# Altium PCB PCB_RAD.PcbDoc
Units mm, origin at the board's own origin, x right, y up, seen from the top; angles counter-clockwise.
Board outline 100.08 x 50.8 mm, 2 copper layers (Top Layer, Bottom Layer); 87 components, 56 nets, 297 pads, 29 vias.
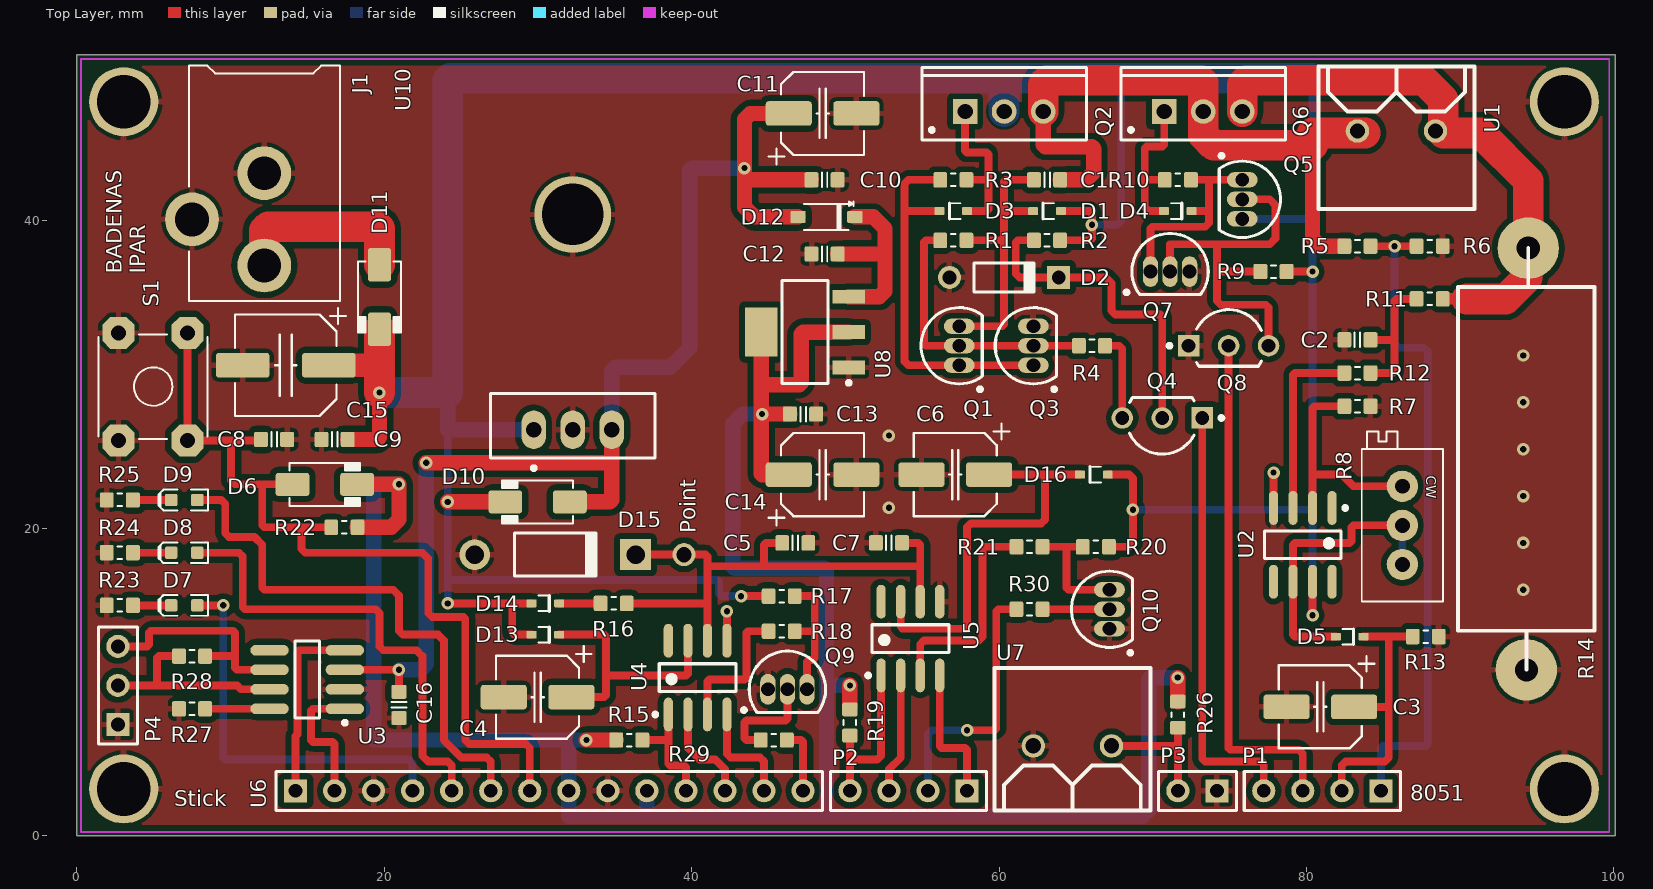
[diagram p0: Top Layer view]
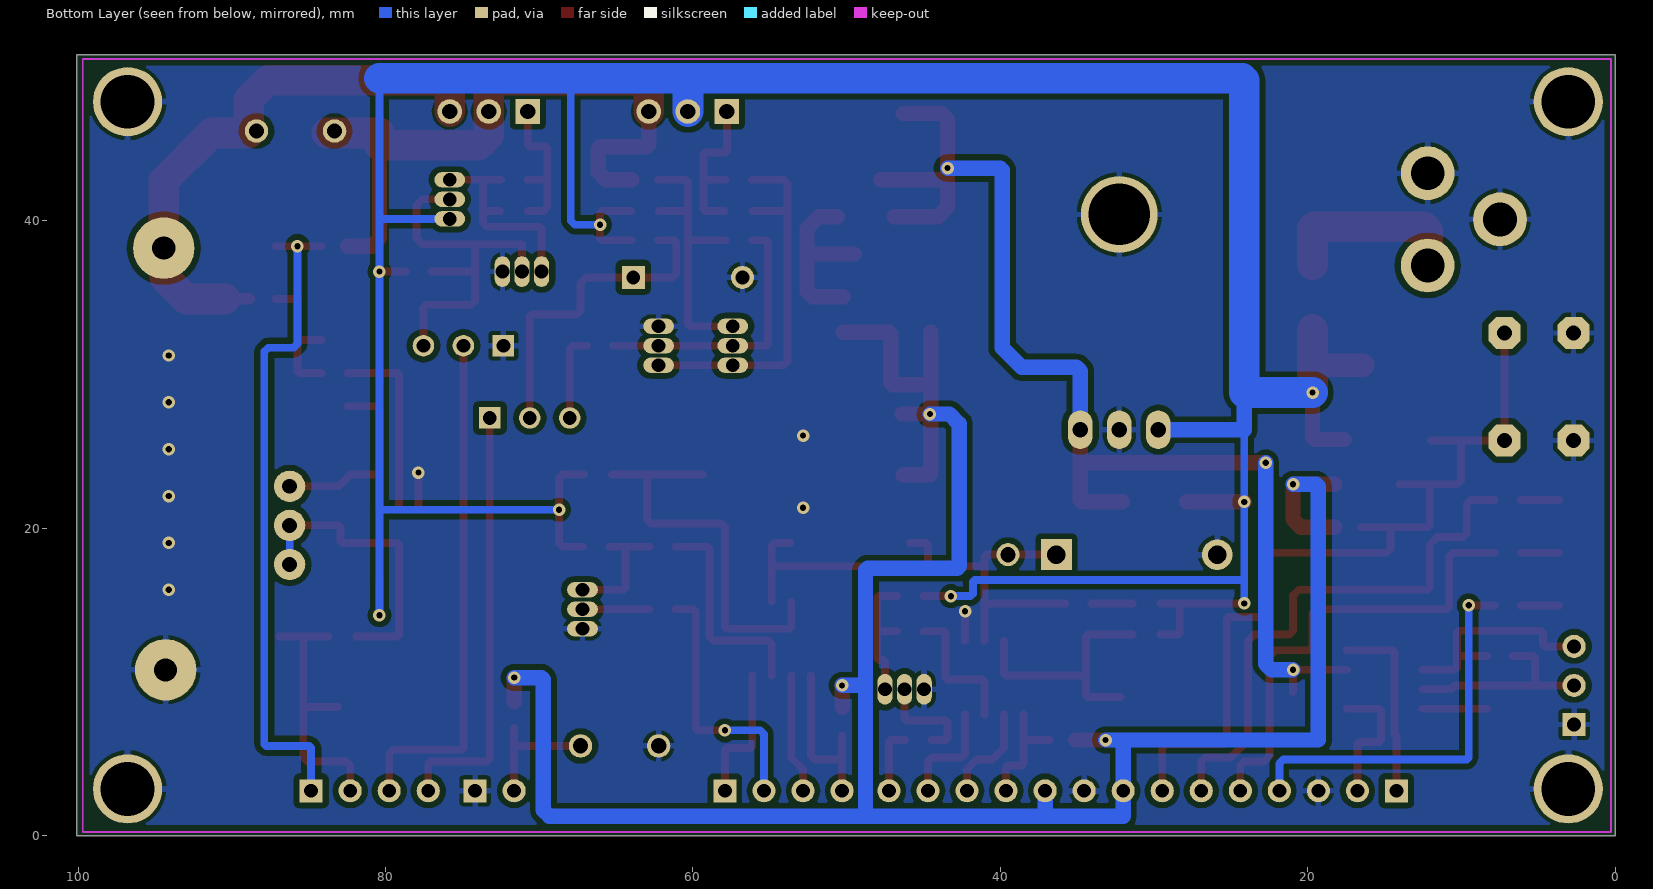
[diagram p1: Bottom Layer view, seen from below]
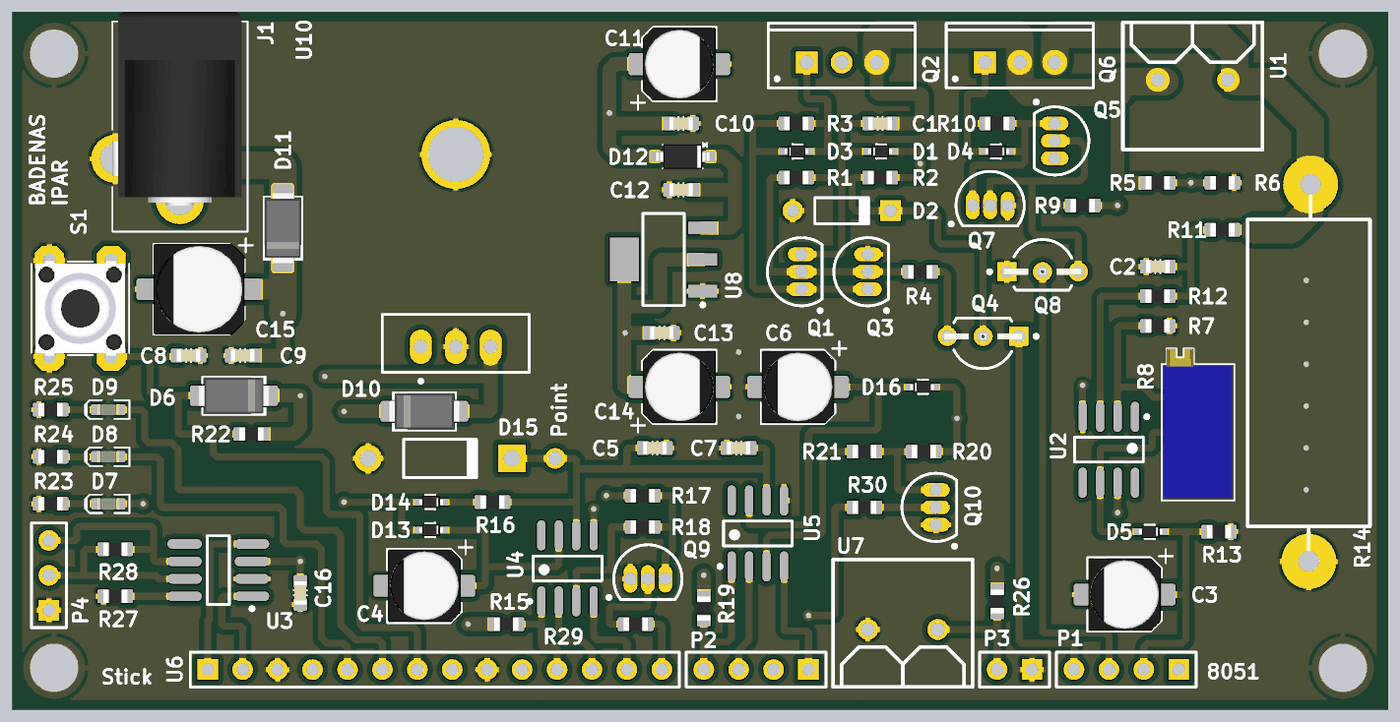
[diagram p2: 3D render of the assembled board from above, using the file's embedded part models]

## Layer stack, top to bottom
Top Solder: solder mask 0.0102, Solder Resist, Dk 3.5
Top Layer: signal copper 0.0356
Dielectric 1: dielectric 0.32, FR-4, Dk 4.8
Bottom Layer: signal copper 0.0356
Bottom Solder: solder mask 0.0102, Solder Resist, Dk 3.5

## Board outline
0,0 0,50.8 100.076,50.8 100.076,0

## Design rules (kind name [scope] priority, off if disabled: settings)
Clearance Clearance_GND [InNamedPolygon('GND')] p1: gap=0.381 ignorepadtopadclearanceinfootprint=FALSE except(0: Arc-Hole Track-Hole SMDPad-Hole THPad-Hole Via-Hole Fill-Hole Poly-Hole Region-Hole Text-Hole)
Clearance [All] p2: gap=0.203 ignorepadtopadclearanceinfootprint=FALSE except(0: Arc-Hole Track-Hole SMDPad-Hole THPad-Hole Via-Hole Fill-Hole Poly-Hole Region-Hole Text-Hole)
PlaneConnect [All] p1: planeconnectstyle=Relief reliefexpansion=0.762 reliefentries=4 reliefconductorwidth=0.381 reliefairgap=0.254
PolygonConnect PolygonConnect_VIA [IsVia] p1: connectstyle=Direct reliefconductorwidth=0.254 reliefentries=4 polygonreliefangle="90 Angle" airgapwidth=0.254
PolygonConnect [All] p2: connectstyle=Relief reliefconductorwidth=0.381 reliefentries=4 polygonreliefangle="90 Angle" airgapwidth=0.254
RoutingVias [All] p1: holewidth=0.406 width=0.813 viastyle="Through Hole" minholewidth=0.406 minwidth=0.813 maxholewidth=0.406 maxwidth=0.813
SolderMaskExpansion [All] p1: expansion=0.102
Width Width_12V [InNet('12V')] p1: maxlimit=50.8 minlimit=0.508 preferedwidth=0.508
Width Width_3V3 [InNet('3V3')] p2: maxlimit=50.8 minlimit=0.5 preferedwidth=0.508
Width Width_5V [InNet('5V')] p3: maxlimit=50.8 minlimit=0.5 preferedwidth=0.508
Width Width_1 [All] p4: maxlimit=50.8 minlimit=0.152 preferedwidth=0.203
29 further rules are at their usual default settings.

## Classes and differential pairs
component class "Controlador del Motor DC": C1 C2 C3 D1 D2 D3 D4 D5 Q1 Q2 Q3 Q4 Q5 Q6 Q7 Q8 R1 R2 R3 R4 R5 R6 R7 R8 R9 R10 R11 R12 R13 R14 U1 U2
component class "Fuente de Alimentación": 2 C9 C10 C11 C12 C13 C14 C15 D10 D11 D12 J1 U8 U10
component class "Microcontrolador 8051": P1 P2 P3 R26 U7
component class "Microcontrolador LPC1769": C8 D6 D7 D8 D9 R22 R23 R24 R25 S1 U6
component class "Protocolo CAN": C16 P4 R27 R28 U3
component class "Protocolo LIN": C4 C5 C6 C7 D13 D14 D15 D16 Q9 Q10 R15 R16 R17 R18 R19 R20 R21 R29 R30 U4 U5

## Components (designator, comment, footprint, x,y, rotation, side; value= is the part's Value field where it differs from the comment)
C1 "47n" CAPC1608X90N 63.119,42.672 r0 top
C2 "100n" CAPC1608X90N 83.312,32.258 r180 top
C3 "10u" CAP_Elec_5x5.7 80.899,8.382 r0 top
C4 "1u" CAP_Elec_5x5.7 29.972,9.017 r0 top
C5 "220pF" CAPC1608X90N 46.736,19.05 r0 top
C6 "1u" CAP_Elec_5x5.7 57.15,23.495 r0 top
C7 "220pF" CAPC1608X90N 52.832,19.05 r180 top
C8 "100n" CAPC1608X90N 12.827,25.781 r0 top
C9 "100n" CAPC1608X90N 16.764,25.781 r180 top
C10 "100n" CAPC1608X90N 48.641,42.672 r0 top
C11 "10u x 16V" CAP_Elec_5x5.7 48.514,46.99 r180 top
C12 "100n" CAPC1608X90N 48.641,37.846 r180 top
C13 "100n" CAPC1608X90N 47.244,27.432 r0 top
C14 "10u x 16V" CAP_Elec_5x5.7 48.514,23.495 r180 top
C15 "100u x 16V" CAP_ELEC_6.3X4.2 13.589,30.607 r0 top
C16 "100nF" CAPC1608X90N 20.955,8.509 r270 top
D1 "1N4148" SOD523F 63.119,40.64 r0 top
D2 "1N750" DO-35 60.325,36.322 r0 top
D3 "1N4148" SOD523F 57.023,40.64 r0 top
D4 "1N4148" SOD523F 71.628,40.64 r180 top
D5 "1N4148" SOD523F 82.804,12.954 r180 top
D6 "1N4007" DO-214AC 16.129,22.86 r0 top
D7 "Green" LED-0603-GREEN 6.985,14.986 r180 top
D8 "Green" LED-0603-GREEN 6.985,18.415 r180 top
D9 "Green" LED-0603-GREEN 6.985,21.844 r180 top
D10 "1N4007" DO-214AC 29.972,21.717 r180 top
D11 "1N4007" DO-214AC 19.685,35.052 r270 top
D12 "1N5819" SOD123 48.768,40.259 r180 top
D13 "1N4148" SOD523F 30.48,13.081 r180 top
D14 "1N4148" SOD523F 30.48,15.113 r180 top
D15 "P6KE43CA" DO-41 31.115,18.288 r0 top
D16 "1N4148" SOD523F 66.167,23.495 r0 top
J1 "CONN_PWR_JACK_2.1x5.5mm" CONN_PWR_JACK_2.1X5.5MM 12.192,50.8 r0 top
P1 "Header 4" HDR1X4 84.836,2.921 r180 top
P2 "Header 4" HDR1X4 57.912,2.921 r180 top
P3 "Header 2" HDR1X2 74.168,2.921 r180 top
P4 "Header 3" HDR1X3 2.667,7.239 r90 top
Q1 "BC547B" TO-92A 57.404,31.877 r0 top
Q2 "IRFZ44N" TO-220AB 60.325,47.117 r0 top
Q3 "BC557B" TO-92A 62.23,31.877 r0 top
Q4 "2N7002" ONSC-TO-92-3-29-11_AM_BL 70.612,27.178 r180 top
Q5 "BC547B" TO-92A 75.819,41.402 r180 top
Q6 "IRFZ44N" TO-220AB 73.279,47.117 r0 top
Q7 "BC557B" TO-92A 71.12,36.703 r270 top
Q8 "2N7002" ONSC-TO-92-3-29-11_AM_BL 74.93,31.877 r0 top
Q9 "BC547B" TO-92A 46.228,9.525 r270 top
Q10 "BC547B" TO-92A 67.183,14.732 r0 top
R1 "10K" RESC1608N_ZERO 57.023,38.735 r180 top
R2 "1K" RESC1608N_ZERO 63.119,38.735 r180 top
R3 "10R" RESC1608N_ZERO 57.023,42.672 r0 top
R4 "1K" RESC1608N_ZERO 66.04,31.877 r0 top
R5 "33K" RESC1608N_ZERO 83.312,38.354 r180 top
R6 "10K" RESC1608N_ZERO 88.011,38.354 r0 top
R7 "4.7K" RESC1608N_ZERO 83.312,27.94 r180 top
R8 "Multivuelta 10K" TRIMPOT_THT_PV36X 86.233,20.193 r270 top
R9 "10K" RESC1608N_ZERO 77.851,36.703 r180 top
R10 "10R" RESC1608N_ZERO 71.628,42.672 r180 top
R11 "1K" RESC1608N_ZERO 88.011,34.925 r180 top
R12 "10K" RESC1608N_ZERO 83.312,30.099 r180 top
R13 "10K" RESC1608N_ZERO 87.757,12.954 r180 top
R14 "Shunt 5W 2.4R" Resistor 94.361,24.511 r270 top
R15 "4K7" RESC1608N_ZERO 35.941,6.223 r0 top
R16 "1K" RESC1608N_ZERO 34.925,15.113 r0 top
R17 "3K9" RESC1608N_ZERO 45.855,15.586 r0 top
R18 "33K" RESC1608N_ZERO 45.855,13.3 r180 top
R19 "4K7" RESC1608N_ZERO 50.292,7.366 r270 top
R20 "3K9" RESC1608N_ZERO 66.294,18.796 r180 top
R21 "33K" RESC1608N_ZERO 61.976,18.796 r180 top
R22 "10K" RESC1608N_ZERO 17.399,20.066 r180 top
R23 "220" RESC1608N_ZERO 2.794,14.986 r180 top
R24 "220" RESC1608N_ZERO 2.794,18.415 r180 top
R25 "220" RESC1608N_ZERO 2.794,21.844 r180 top
R26 "10K" RESC1608N_ZERO 71.628,7.874 r270 top
R27 "2K2" RESC1608N_ZERO 7.493,8.255 r0 top
R28 "120R" RESC1608N_ZERO 7.493,11.684 r0 top
R29 "4K7" RESC1608N_ZERO 45.339,6.223 r180 top
R30 "4K7" RESC1608N_ZERO 61.976,14.732 r0 top
S1 "SW_THT_PB_4.3mm" TACT-SWITCH-TS1143 4.953,29.21 r270 top
U1 "Bornera_2P" Bornera 85.852,45.847 r0 top
U2 "TL061IDRE4" TI-D8_N 79.756,18.923 r270 top
U3 "MCP2551T-E/SN" SOIC-SN8_M 14.986,10.16 r180 top
U4 "MCP2003A-E/SN" SOIC-SN8_N 40.386,10.287 r90 top
U5 "MCP2003A-E/SN" SOIC-SN8_N 54.229,12.827 r90 top
U6 "LPC1769" Header_12 30.734,2.921 r0 top
U7 "Bornera_2P" Bornera 64.77,5.842 r180 top
U8 "AP7361" MP04A_L 47.371,32.766 r180 top
U10 "LM7805" "TO-220 FLAT" 32.258,26.416 r180 top

## Footprints (in the part's own frame and the unit in brackets; to place one, negate y for a bottom-side part, rotate by r counter-clockwise, add the part's x,y. Pads: shape width x height; smd on the part's side, far side on the other; paste and mask are expansions set on the pad)
Bornera [mil] "Bornera Pitch 5_mm"
  round 60 hole 39.37: 1(100,0) 2(-100,0)
  silkscreen extent -200,-200 200,165
CAP_Elec_5x5.7 [mm] "Capacitor, polarized, aluminum can; 5x5.7mm DxH"
  round 0.508 on Mech15: 0(0,0)
  rrect25% 3x1.6 smd: 1(2.2,0) 2(-2.2,0)
  silkscreen extent -2.7,-2.7 3.5,3.3, body extent -2.65,-2.65 2.65,2.65, height 5.7
CAP_ELEC_6.3X4.2 [mm] "Capacitor, polarized, aluminum can; 6.3x4.2mm DxH"
  round 0.508 on Mech15: 0(0,0)
  rrect25% 3.5x1.6 smd: 1(2.8,0) 2(-2.8,0)
  silkscreen extent -3.3,-3.3 3.9,3.7, body extent -3.3,-3.3 3.3,3.3, height 4.23
CAPC1608X90N [mm] "Chip Capacitor, Body 1.6x0.8mm, EIA 0603, IPC Medium Density"
  round 0.254 on Mech15: 0(0,0)
  rrect25% 0.9x1 smd: 1(-0.85,0) 2(0.85,0)
  Top Layer pour cut-out: -0.6,0.5 -0.4,0.7 0.4,0.7 0.6,0.5 0.6,-0.5 0.4,-0.7 -0.4,-0.7 -0.6,-0.5
  silkscreen extent -0.18,-0.48 0.18,0.48, body extent -0.85,-0.45 0.85,0.45, height 0.89
CONN_PWR_JACK_2.1X5.5MM [mm] "Power Connector, 2.1mm ID, 5.5mm OD"
  round 3.5 hole 2.2: 1(0,-13.7) 2(0,-7.7) 3(-4.7,-10.7)
  silkscreen extent -4.9,-16 4.92,-0.7, body extent -4.9,-14.1 4.5,0, height 11
DO-35 [mm] "Diode, Axial; Body 3.8 x 1.9 mm (LxDia. max), Lead Dia. 0.53 mm (max)"
  round 1.5 hole 0.9: 1(-3.55,0)
  rect 1.5x1.5 hole 0.9: 2(3.55,0)
  silkscreen extent -1.95,-0.95 2.05,0.95
DO-41 [mm] "Diode, Axial; Body 5.2 x 2.7 mm (LxDia. max), Lead Dia. 0.86 mm (max)"
  round 2 hole 1.2: 1(-5.23,0)
  rect 2x2 hole 1.2: 2(5.23,0)
  silkscreen extent -2.65,-1.4 2.75,1.4
DO-214AC [mm] "JEDEC DO214 variation AC. SMA"
  round 0.508 on Mech15: 0(0,0)
  rrect25% 2.2x1.5 smd: A(-2.1,0) K(2.1,0)
  silkscreen extent -2.3,-1.4 2.3,1.4, body extent -2.6,-1.3 2.6,1.3, height 2.42
HDR1X2 [mm] "Connector; Header; 2 Position"
  rect 1.5x1.5 hole 0.9: 1(0,0)
  round 1.5 hole 0.9: 2(2.54,0)
  silkscreen extent -1.27,-1.27 3.81,1.27
HDR1X3 [mm] "Connector; Header; 3 Position"
  rect 1.5x1.5 hole 0.9: 1(0,0)
  round 1.5 hole 0.9: 2(2.54,0) 3(5.08,0)
  silkscreen extent -1.27,-1.27 6.35,1.27
HDR1X4 [mm] "Connector; Header; 4 Position"
  rect 1.5x1.5 hole 0.9: 1(0,0)
  round 1.5 hole 0.9: 2(2.54,0) 3(5.08,0) 4(7.62,0)
  silkscreen extent -1.27,-1.27 8.89,1.27
Header_12 [mm] "Header 12 Pin"
  rect 1.5x1.5 hole 0.9: 1(-16.51,0)
  round 1.5 hole 0.9: 2(-13.97,0) 3(-11.43,0) 4(-8.89,0) 5(-6.35,0) 6(-3.81,0) 7(-1.27,0) 8(1.27,0) 9(3.81,0) 10(6.35,0) 11(8.89,0) 12(11.43,0) 13(13.97,0) 14(16.51,0)
  silkscreen extent -17.78,-1.27 17.78,1.27
LED-0603-GREEN [mm]
  round 0.254 on Mech15: 0(0,0)
  rrect25% 0.8x0.8 smd: A(-0.85,0) K(0.85,0)
  Top Layer pour cut-out: -0.5,0.5 0.5,0.5 0.5,-0.5 -0.5,-0.5
  silkscreen extent -1.55,-0.67 1.68,0.67, body extent -0.8,-0.4 0.8,0.4, height 0.75
MP04A_L [mm] "SOT223, 4-Leads, Body 6.5x3.5mm, Pitch 2.3mm, Lead Span 7mm, IPC High Density"
  rect 2.1x0.9 smd: 1(-2.85,2.3) 2(-2.85,0) 3(-2.85,-2.3)
  rect 2.1x3.2 smd: 4(2.85,0)
  silkscreen extent -2.98,-3.35 1.5,3.42, body extent -1.86,-3.35 1.86,3.35, height 1.8
ONSC-TO-92-3-29-11_AM_BL [mm] "TO, 3-Leads, Body Dia 4.7mm, Pitch 2.6mm"
  rect 1.4x1.4 hole 0.9: 1(-2.6,0)
  round 1.4 hole 0.9: 2(0,0) 3(2.6,0)
  silkscreen extent -3.98,-1.34 2.13,2.35, body extent -2.84,-1.34 2.84,2.35, height 5.33
RESC1608N_ZERO [mm] "Chip Resistor, Body 1.6x0.8mm, 0603, IPC Medium Density"
  round 0.254 on Mech15: 0(0,0)
  rrect25% 0.9x1 smd: 1(-0.85,0) 2(0.85,0)
  Top Layer pour cut-out: -0.6,0.5 -0.4,0.7 0.4,0.7 0.6,0.5 0.6,-0.5 0.4,-0.7 -0.4,-0.7 -0.6,-0.5
  silkscreen extent -0.15,-0.41 0.15,0.41, body extent -0.87,-0.47 0.88,0.48, height 0.54
Resistor [mm] "High Power Resistor 10W"
  round 4 hole 1.5: 1(13.716,-0.063) 2(-13.716,0.063)
  silkscreen extent -13.72,-4.51 13.72,4.38
SOD123 [mm] "SOD-123; 2 Leads; Body 2.7 x 1.6 mm, (LxW)"
  round 0.508 on Mech15: 0(0,0)
  rrect25% 1x0.8 smd: A(1.85,0) K(-1.85,0)
  silkscreen extent -1.75,-1 1.45,0.85, body extent -1.95,-0.9 1.95,0.9, height 1.18
SOD523F [mm] "SOD-523F; 2 Leads; Body 1.3 x 0.9 mm, (LxW)"
  round 0.508 on Mech15: 0(0,0)
  rrect20% 0.65x0.5 smd: A(0.9,0) K(-0.9,0)
  Top Layer pour cut-out: -0.725,-0.25 -0.725,0.25 -0.525,0.45 0.525,0.45 0.725,0.25 0.725,-0.25 0.525,-0.45 -0.525,-0.45
  silkscreen extent -0.25,-0.51 0.45,0.51, body extent -0.85,-0.45 0.85,0.45, height 0.7
SOIC-SN8_M [mm] "SOIC, 8-Leads, Body 4.9x3.9mm, Pitch 1.27mm, IPC Low Density"
  oval 2.5x0.7 smd: 1(-2.45,1.905) 2(-2.45,0.635) 3(-2.45,-0.635) 4(-2.45,-1.905) 5(2.45,-1.905) 6(2.45,-0.635) 7(2.45,0.635) 8(2.45,1.905)
  silkscreen extent -2.58,-2.5 0.8,2.93, body extent -2,-2.5 2,2.5, height 1.75
SOIC-SN8_N [mm] "SOIC, 8-Leads, Body 4.9x3.9mm, Pitch 1.27mm, IPC Medium Density"
  oval 2.2x0.6 smd: 1(-2.4,1.905) 2(-2.4,0.635) 3(-2.4,-0.635) 4(-2.4,-1.905) 5(2.4,-1.905) 6(2.4,-0.635) 7(2.4,0.635) 8(2.4,1.905)
  silkscreen extent -2.52,-2.5 0.9,2.88, body extent -2,-2.5 2,2.5, height 1.75
TACT-SWITCH-TS1143 [mm] "Bondtact sealed TH tact switch"
  round 0.508 on Mech15: 0(0,0)
  oct 2.1x2.1 hole 0.965: 1(-3.5,-2.25) 1(3.5,-2.25) 2(-3.5,2.25) 2(3.5,2.25)
  silkscreen extent -3.4,-3.56 3.4,3.56, body extent -4.13,-3.25 4.13,3.25, height 4.3
TI-D8_N [mm] "SOIC, 8-Leads, Body 4.9x3.9mm, Pitch 1.27mm, IPC Medium Density"
  oval 2.2x0.6 smd: 1(-2.4,1.905) 2(-2.4,0.635) 3(-2.4,-0.635) 4(-2.4,-1.905) 5(2.4,-1.905) 6(2.4,-0.635) 7(2.4,0.635) 8(2.4,1.905)
  silkscreen extent -2.52,-2.5 0.9,2.88, body extent -2,-2.5 2,2.5, height 1.75
TO-92A [mm] "TO, Flat Index; 3 In-Line, Axial Leads; Body Dia. 4.5mm; Leads 0.51 x 0.48 mm (max)"
  oval 2x1 hole 0.9: 1(0,-1.27) 2(0,0) 3(0,1.27)
  silkscreen extent -2.48,-2.95 1.5,2.48, body extent -2.48,-2.5 1.5,2.5, height 6.86
"TO-220 FLAT" [mm]
  oval 1.6x2.5 hole 1: 1(2.54,0) 2(0,0) 3(-2.54,0)
  round 5 hole 4: ""(0,-14)
  silkscreen extent -5.35,-2.35 5.35,2.62, body extent -5.4,-2.35 5.4,1.9, height 19.4
TO-220AB [mm] "TO, Thru-Hole, Vertical, Heatsink Mounted; 3 In-Line Leads; Pitch 2.54 mm"
  rect 1.6x1.6 hole 1: 1(-2.54,0)
  round 1.6 hole 1: 2(0,0) 3(2.54,0)
  silkscreen extent -5.35,-1.85 5.35,2.85, body extent -5.4,-1.9 5.4,2.9, height 19.3
TRIMPOT_THT_PV36X [mil] "TRIMMER, MURATA, PV36X"
  round 80 hole 38: CCW(100,0) CW(-100,0) W(0,0)
  silkscreen extent -240,-104 195,104, body extent -240,-98 189,98, height 394

## Part data
C1: library part CAPC_47n_0603_X7R_50V_10%, "Capacitor SMD Cer 47nF 10% 50V X7R 0603"
C2 C8 C9 C10 C12 C13 C16: library part CAPC_47n_0603_X7R_50V_10%, "Capacitor SMD Cer 100nF 10% 50V X7R 0603"
C3 C4 C6 C11 C14: library part CAP_Elec_4x4
C5 C7: library part CAPC_47n_0603_X7R_50V_10%, "Capacitor SMD Cer 220pF 10% 50V X7R 0603"
C15: library part CAP_Elec_6.2x6.2
D1 D3 D4 D5 D13 D14 D16: library part DIODE_1N4148_200mA_SOD523F, "Diode 1N4148 SMD SOD-523F"
D2: library part "Diode 1N914", "Diodo 1N750 THD DO-35"
D6 D10 D11: library part DIODE_100V_1.5A_SMA, "Diode 1N4007 SMD DO-214AC 100V 1.5A SMA"
D7 D8 D9: library part LED_SMD_Green_0603_570nm, "LED 0603 SMD Green 570nm 50mcd 20mA"
D12: library part DIODE_SCHOTTKY_40V_1A, "Diode Schottky SMD 40V 1A SOD123"
D15: library part "Diode 1N4007", "1 Amp General Purpose Rectifier Do-41"
J1: "Power Connector, THT, 2.1mm ID, 5.5mm OD"
P1 P2: "Header, 4-Pin"
P3: "Header, 2-Pin"
P4: "Header, 3-Pin"
Q1 Q5 Q9 Q10: library part 2N3904, "NPN General Purpose Amplifier"
Q2 Q6: library part NMOS-2, "N-Channel Power MOSFET"
Q3 Q7: library part 2N3906, "PNP General Purpose Amplifier"
Q4 Q8: library part CMP-1058-00948-1, "Small Signal MOSFET, 200 mA, 60 V, N-Channel, 3-Pin TO-92, Pb-Free, Fan-Fold"
R1 R6 R9 R12 R13 R22 R26: library part RES_0R_0603, "Resistor SMD 0603 10K 5%"
R2 R4 R11 R16: library part RES_0R_0603, "Resistor SMD 0603 1K 5%"
R3 R10: library part RES_0R_0603, "Resistor SMD 0603 10 Ohm 5%"
R5 R18 R21: library part RES_0R_0603, "Resistor SMD 0603 33K 5%"
R7 R15 R19 R29 R30: library part RES_0R_0603, "Resistor SMD 0603 4.7K 5%"
R8: library part RES_TRIMMER_10K_25T_THT, "Trimmer THD 10K 500mW 25-turn"
R14: library part "Resistor 10W", "Resistencia de Alambre 5W 2.4 Ohm"
R17 R20: library part RES_0R_0603, "Resistor SMD 0603 3.9K 5%"
R23 R24 R25: library part RES_0R_0603, "Resistor SMD 0603 220 Ohm 5%"
R27: library part RES_0R_0603, "Resistor SMD 0603 2.2K 5%"
R28: library part RES_0R_0603, "Resistor SMD 0603 120 Ohm 5%"
S1: "Switch, tact, 4.3mm stem"
U2: library part CMP-0017-00647-1, "Low-Power JFET-Input General-Purpose Operational Amplifier, 7 to 36 V, -40 to 85 degC, 8-pin SOIC (D8), Green (RoHS & no Sb/Br)"
U3: library part CMP-0186-00036-2, "High-Speed CAN Transceiver, 8-Pin SOIC, Extended Temperature, Tape and Reel"
U4 U5: library part CMP-0186-00221-1, "LIN J2602 Transceiver, 8-Pin SOIC, Extended Temperature"
U6: library part LPC1769_Pinera, "LPC1769 Pinera 5mm"
U8: library part CMP-0062-01652-3, "800mA Low-Dropout Linear Regulator, 4-pin SOT-223"
U10: "Regulador LM7805 Flat TO-220"

## Free pads (board coordinates)
  round 1.5 hole 1: 2(39.497,18.288)
  round 4.5 hole 3.5: ""(3.048,3.048) ""(3.048,47.752) ""(96.774,3.048) ""(96.774,47.752)

## Via types
v1: diameter 0.813, hole 0.406, Top Layer to Bottom Layer, tented both sides, 29 vias

## Nets (pads, with @x,y where several pads share a name; then routed paths per layer and width w, separated by ;. In a path a pad name is that pad's centre, name@x,y a point inside that pad or via, vN(x,y) a via of type N, cw(c..) or ccw(c..) an arc to the next point about the centre after c; other vN are vias at no path point)
3V3: C13.1 C14.1 D6.K R15.1 R19.1 R22.1 R26.1 U6.8 U6.10 U8.2 U8.4 | length 156.8
  Top Layer w1: D6.K v1(20.955,22.86) 20.955,20.574 20.447,20.066 R22.1 ; v1(33.147,6.223) R15.1 ; U8.4 44.521,29.337 ; C14.1 44.577,23.495 44.521,23.551 v1@44.521,27.432 ; C13.1 v1(44.577,27.432) v1@44.521,27.432 ; U8.2 47.244,32.766 47.117,32.639 47.117,29.464 46.99,29.337 44.521,29.337 ; R19.1@50.292,8.343 v1(50.292,9.779) ; R26.1 v1(71.628,10.287) ; v1@44.521,27.432 44.521,29.337
  Bottom Layer w1: 19.304,6.223 19.304,22.733 19.431,22.86 v1(20.955,22.86) ; 19.431,6.223 32.004,6.223 ; v1(33.147,6.223) 32.004,6.223 ; U6.10 37.084,1.27 ; v1(44.577,27.432) 43.307,27.432 42.672,26.797 42.672,17.526 42.799,17.399 48.641,17.399 48.768,17.272 48.768,9.779 ; v1(50.292,9.779) 48.768,9.779 ; v1(71.628,10.287) 69.85,10.287 69.723,10.16 69.723,1.651 69.342,1.27 48.768,1.27 ; 32.004,6.223 U6.8 32.004,1.27 37.084,1.27 ; 37.084,1.27 48.768,1.27 ; 48.768,1.27 48.768,9.779
5V: C10.1 C11.1 C16.1 D10.A D12.A U3.3 U10.3 | length 80.9
  Top Layer w0.508: U3.3 v1(20.955,10.795) C16.1
  Top Layer w1: v1(22.733,24.257) 34.798,24.257 ; D10.A 34.671,21.717 34.798,21.844 U10.3 ; C11.1 43.815,46.99 43.434,46.609 v1(43.434,43.434) 43.434,42.672 ; D12.A 44.069,40.259 43.434,40.894 43.434,42.672 ; C10.1 43.434,42.672
  Bottom Layer w1: v1(20.955,10.795) 22.352,10.795 22.733,11.176 v1(22.733,24.257) ; U10.3 34.798,30.226 35.052,30.48 38.608,30.48 39.878,31.75 39.878,43.307 40.005,43.434 v1(43.434,43.434)
12V: C9.1 C15.1 D1.A D10.K D11.K D13.A D14.A D16.A Q2.2 Q5.3 R2.1 R9.1 R17.1 R20.1 U2.7 U10.1 | length 228
  Top Layer w0.508: v1(24.13,15.113) 28.321,15.113 ; D13.A 28.448,13.081 28.321,13.208 28.321,15.113 ; D14.A 28.321,15.113 ; v1(43.215,15.586) R17.1 ; R2.1 65.913,38.735 66.04,38.862 v1(66.04,39.751) 66.04,40.513 65.913,40.64 D1.A ; D16.A 68.453,23.495 68.707,23.241 v1(68.707,21.209) 68.707,19.05 68.453,18.796 R20.1 ; R9.1 v1(80.391,36.703) ; v1(80.391,14.351) U2.7
  Top Layer w1: C9.1 19.558,25.781 19.685,25.908 v1(19.685,28.829) ; v1(24.13,21.717) D10.K
  Top Layer w1.5: C15.1 19.558,30.607
  Top Layer w2: v1(19.685,28.829) D11.K
  Bottom Layer w0.508: v1(24.13,15.113) 24.13,16.637 ; 24.13,26.416 v1(24.13,21.717) 24.003,21.59 24.13,21.463 24.13,16.637 ; v1(43.215,15.586) 41.945,15.586 41.783,15.748 41.783,16.51 41.656,16.637 24.13,16.637 ; v1(66.04,39.751) 67.691,39.751 67.945,40.005 67.945,48.387 ; v1(68.707,21.209) 80.391,21.209 ; Q5.3 80.391,40.132 ; v1(80.391,14.351) 80.391,21.209 ; 80.391,49.276 v1(80.391,36.703) 80.391,21.209
  Bottom Layer w1: 24.13,28.829 24.13,26.416 U10.1
  Bottom Layer w2: v1(19.685,28.829) 24.13,28.829 24.13,49.149 24.257,49.276 60.325,49.276 ; Q2.2 60.325,49.276 ; 80.391,49.276 60.325,49.276
ADC_SENSOR: P3.2 R26.2 U7.2 | length 8.4
  Top Layer w0.508: U7.2 71.628,5.842 ; P3.2 71.628,5.842 ; R26.2 71.628,5.842
GND: C2.2 C3.2 C4.2 C5.2 C6.2 C7.2 C8.2 C9.2 C10.2 C11.2 C12.2 C13.2 C14.2 C15.2 C16.2 D2.1 D15.1 J1.2 J1.3 P3.1 P4.1 pad. Q3.3 Q7.3 Q8.1 Q9.1 Q10.1 R6.2 R7.1 R13.1 R14.1 R23.2 R24.2 R25.2 R27.1 S1.1 U2.4 U3.2 U4.5 U5.5 U6.3 U6.9 U7.1 U8.1 U10. U10.2 | length 4.2
  Top Layer w0.508: U4.5 v1(42.291,14.605) ; U2.4 v1(77.851,23.622)
  other v1: 94.107,16.002 94.107,19.05 52.832,21.336 94.107,22.098 94.107,25.146 52.832,26.035 94.107,28.194 94.107,31.242
LED_1: D7.A U6.4 | length 25.9
  Top Layer w0.508: D7.A v1(9.525,14.986)
  Bottom Layer w0.508: v1(9.525,14.986) 9.525,5.08 9.652,4.953 21.59,4.953 21.844,4.699 U6.4
LED_2: D8.A U6.5 | length 30.9
  Top Layer w0.508: D8.A 10.541,18.415 10.795,18.161 10.795,14.859 10.922,14.732 19.431,14.732 19.685,14.478 19.685,12.319 19.939,12.065 22.098,12.065 22.479,11.684 22.479,5.207 22.86,4.826 24.13,4.826 24.384,4.572 U6.5
LED_3: D9.A U6.6 | length 35.9
  Top Layer w0.508: D9.A 9.398,21.844 9.652,21.59 9.652,19.685 9.906,19.431 11.557,19.431 12.065,18.923 12.065,16.129 12.192,16.002 20.574,16.002 20.955,15.621 20.955,13.335 21.209,13.081 23.495,13.081 23.876,12.7 23.876,6.223 25.019,5.08 26.67,5.08 26.924,4.826 U6.6
LPC_CAN_RX: U3.4 U6.1 | length 12.2
  Top Layer w0.508: U6.1 14.224,6.477 14.351,6.604 14.351,11.938 14.478,12.065 U3.4
LPC_CAN_TX: U3.1 U6.2 | length 8.8
  Top Layer w0.508: U6.2 16.764,5.969 16.637,6.096 15.367,6.096 15.24,6.223 15.24,8.128 15.367,8.255 U3.1
LPC_CS: U4.2 U6.12 | length 6.6
  Top Layer w0.508: U4.2 39.751,5.715 40.513,4.953 41.529,4.953 42.164,4.318 U6.12
LPC_RX: R15.2 U4.1 U6.11 | length 7.7
  Top Layer w0.508: R15.2 38.481,6.223 ; U4.1 38.481,6.223 ; U6.11 39.624,4.445 39.497,4.572 38.608,4.572 38.481,4.699 38.481,6.223
LPC_TX: U4.4 U6.13 | length 7.1
  Top Layer w0.508: U4.4 42.291,5.334 42.545,5.08 44.45,5.08 44.704,4.826 U6.13
LPC_W: R29.1 U6.14 | length 4.3
  Top Layer w0.508: R29.1 47.117,6.223 47.244,6.096 U6.14
MOTOR: C1.2 Q2.3 Q6.2 R5.2 U1.2 | length 45.2
  Top Layer w1: Q2.3 62.865,44.958 62.992,44.831 66.04,44.831 66.167,44.704 66.167,43.18 65.659,42.672 C1.2 ; 80.391,45.72 80.391,44.914 80.391,38.862 80.899,38.354 R5.2
  Top Layer w2: Q2.3 62.865,48.895 63.119,49.149 73.152,49.149 73.279,49.022 Q6.2 73.279,45.593 73.958,44.914 80.391,44.914 ; 80.391,45.72 U1.2@83.82,45.72
MS_BUS: C5.1 C7.1 D15.2 pad.2 R16.2 U4.6 U5.6 | length 36.9
  Top Layer w0.508: R16.2 41.021,15.113 ; D15.2 pad.2 40.894,18.288 41.021,18.161 41.021,15.113 ; U4.6 41.021,15.113 ; 41.021,17.526 44.704,17.526 ; C5.1 44.831,19.05 44.704,18.923 44.704,17.526 ; C7.1 54.737,19.05 54.864,18.923 54.864,17.526 ; U5.6 54.864,17.526 ; 44.704,17.526 54.864,17.526
NetC1_1: C1.1 D1.K Q1.3 R1.1 | length 18.6
  Top Layer w0.508: Q1.3 60.198,33.147 60.325,33.274 60.325,38.735 ; R1.1 60.325,38.735 ; D1.K 60.325,40.64 ; C1.1 60.452,42.672 60.325,42.545 60.325,40.64 ; 60.325,38.735 60.325,40.64
NetC2_1: C2.1 R11.2 R12.1 | length 9.2
  Top Layer w0.508: R12.1 85.598,30.099 85.725,30.226 85.725,32.258 ; C2.1 85.725,32.258 ; R11.2 85.852,34.925 85.725,34.798 85.725,32.258
NetC3_1: C3.1 D5.K P1.2 R13.2 | length 18.3
  Top Layer w0.508: P1.2 82.296,4.572 82.55,4.826 85.09,4.826 85.344,5.08 85.344,8.382 ; C3.1 85.344,8.382 ; D5.K 85.383,12.954 ; R13.2 85.344,12.954 85.344,8.382
NetC4_1: C4.1 D13.K U4.7 | length 16.7
  Top Layer w0.508: D13.K 34.29,13.081 34.417,12.954 34.417,10.414 ; C4.1 34.29,9.017 34.417,9.144 34.417,10.414 ; U4.7 39.751,10.541 39.624,10.414 34.417,10.414
NetC6_1: C6.1 D16.K U5.7 | length 26.7
  Top Layer w0.508: U5.7 53.594,13.589 53.721,13.462 57.785,13.462 57.912,13.589 57.912,20.066 58.166,20.32 62.738,20.32 62.992,20.574 62.992,23.495 ; C6.1 62.992,23.495 ; D16.K 62.992,23.495
NetC12_1: C12.1 D12.K U8.3 | length 11.9
  Top Layer w1: C12.1 52.578,37.846 ; U8.3 52.211,35.066 52.578,35.433 52.578,37.846 ; D12.K 51.816,40.259 52.578,39.497 52.578,37.846
NetD2_2: D2.2 Q4.2 R2.2 | length 21.6
  Top Layer w0.508: R2.2 61.214,38.735 61.087,38.608 61.087,36.576 61.341,36.322 D2.2 66.929,36.322 67.31,35.941 67.31,34.163 67.564,33.909 70.485,33.909 70.612,33.782 Q4.2
NetD3_A: D3.A Q2.1 R3.2 | length 10.6
  Top Layer w0.508: Q2.1 57.785,44.577 57.912,44.45 59.182,44.45 59.309,44.323 59.309,42.672 ; R3.2 59.309,42.672 ; D3.A 59.182,40.64 59.309,40.767 59.309,42.672
NetD3_K: D3.K Q1.1 Q3.1 R3.1 | length 24.7
  Top Layer w0.508: 53.848,40.64 D3.K ; R3.1 54.102,42.672 53.848,42.418 53.848,30.861 54.102,30.607 Q1.1 Q3.1
NetD4_A: D4.A Q6.1 R10.2 | length 10
  Top Layer w0.508: D4.A 69.723,40.64 69.469,40.894 69.469,42.672 ; Q6.1 70.739,44.958 70.612,44.831 69.596,44.831 69.469,44.704 69.469,42.672 ; R10.2 69.469,42.672
NetD4_K: D4.K Q5.1 Q7.1 R10.1 | length 14
  Top Layer w0.508: Q7.1 69.85,39.497 69.977,39.624 73.406,39.624 73.66,39.878 73.66,40.64 ; R10.1 Q5.1 ; D4.K 73.66,40.64 ; 73.66,42.672 73.66,40.64
NetD5_A: D5.A R8.CCW R8.W U2.6 | length 19.4
  Top Layer w0.508: D5.A 79.248,12.954 79.121,13.081 U2.6 79.121,18.923 79.248,19.05 82.804,19.05 82.931,19.177 82.931,20.066 83.058,20.193 R8.W
  Bottom Layer w0.508: R8.CCW R8.W
NetD7_K: D7.K R23.1 | length 2.5
  Top Layer w0.508: R23.1 D7.K
NetD8_K: D8.K R24.1 | length 2.5
  Top Layer w0.508: R24.1 D8.K
NetD9_K: D9.K R25.1 | length 2.5
  Top Layer w0.508: R25.1 D9.K
NetD11_A: D11.A J1.1 | length 12.3
  Top Layer w2: J1.1 12.192,39.37 12.446,39.624 19.558,39.624 19.685,39.497 D11.A
NetD14_K: D14.K R16.1 | length 2.7
  Top Layer w0.508: D14.K R16.1
NetP4_2: P4.2 R28.1 U3.7 | length 13.2
  Top Layer w0.508: P4.2 5.207,9.779 ; R28.1 5.334,11.684 5.207,11.557 5.207,9.779 ; U3.7 10.668,9.525 10.414,9.779 5.207,9.779
NetP4_3: P4.3 R28.2 U3.6 | length 15.1
  Top Layer w0.508: P4.3 4.572,12.319 4.699,12.446 4.699,13.208 4.826,13.335 10.16,13.335 10.287,13.208 10.287,11.684 ; R28.2 10.287,11.684 ; U3.6 10.414,10.795 10.287,10.922 10.287,11.684
NetQ1_2: Q1.2 Q3.2 R1.2 R4.1 | length 17.8
  Top Layer w0.508: R1.2 55.245,38.735 55.118,38.608 55.118,32.004 55.245,31.877 Q1.2 Q3.2 R4.1
NetQ4_3: Q4.3 R4.2 | length 5.7
  Top Layer w0.508: R4.2 67.818,31.877 68.012,31.683 Q4.3
NetQ5_2: Q5.2 Q7.2 Q8.3 R9.2 | length 25.8
  Top Layer w0.508: Q7.2 71.12,38.481 74.168,38.481 ; Q5.2 77.597,41.402 77.978,41.021 77.978,38.862 77.597,38.481 74.168,38.481 ; R9.2 74.168,36.703 ; Q8.3 77.53,34.357 77.343,34.544 74.422,34.544 74.168,34.798 74.168,36.703 ; 74.168,36.703 74.168,38.481
NetQ6_3: Q6.3 R11.1 R14.2 U1.1 | length 35.8
  Top Layer w0.762: R11.1 89.408,34.925
  Top Layer w2: Q6.3 75.819,48.895 76.073,49.149 87.63,49.149 88.9,47.879 88.9,45.72 91.313,45.72 94.424,42.608 94.424,39.116 94.361,39.052 94.361,36.322 92.964,34.925 90.424,34.925
NetQ9_2: Q9.2 R29.2 | length 6.9
  Top Layer w0.508: R29.2 43.561,6.223 43.434,6.35 43.434,7.366 43.561,7.493 46.101,7.493 46.228,7.62 Q9.2
NetQ9_3: Q9.3 R17.2 R18.1 | length 8.9
  Top Layer w0.508: R18.1 47.914,13.3 ; R17.2 47.914,15.586 48.006,15.494 48.006,11.557 47.879,11.43 47.625,11.43 47.498,11.303 Q9.3
NetQ10_2: Q10.2 R30.2 | length 4.4
  Top Layer w0.508: R30.2 Q10.2
NetQ10_3: Q10.3 R20.2 R21.1 | length 8.1
  Top Layer w0.508: R21.1 64.389,18.796 ; R20.2 64.389,18.796 ; Q10.3 64.516,16.002 64.389,16.129 64.389,18.796
NetR7_2: R7.2 R8.CW U2.2 | length 14.8
  Top Layer w0.508: U2.2 80.391,23.495 ; R7.2 80.518,27.94 80.391,27.813 80.391,23.495 ; R8.CW 83.058,22.733 82.296,23.495 80.391,23.495
NetR12_2: R12.2 U2.3 | length 12
  Top Layer w0.508: U2.3 79.121,29.972 79.248,30.099 R12.2
NetR18_2: R18.2 U4.3 | length 9.2
  Top Layer w0.508: U4.3 41.021,10.033 41.148,10.16 43.434,10.16 43.561,10.287 43.561,13.208 43.653,13.3 R18.2
NetR21_2: R21.2 U5.3 | length 14.3
  Top Layer w0.508: U5.3 54.864,12.446 55.118,12.7 58.674,12.7 58.928,12.954 58.928,18.669 59.055,18.796 R21.2
NetR27_2: R27.2 U3.8 | length 4.2
  Top Layer w0.508: R27.2 U3.8
PWM: P1.4 Q4.1 | length 28.1
  Top Layer w0.508: Q4.1 73.212,5.02 73.406,4.826 77.089,4.826 77.216,4.699 P1.4
RESET_TS: C8.1 D6.A R22.2 S1.2 U6.7 | length 56.8
  Top Layer w0.508: S1.2@7.203,32.71 7.203,25.71 10.033,25.71 ; C8.1@11.977,25.71 10.033,25.71 ; D6.A 12.065,22.86 ; R22.2 14.605,20.066 ; U6.7 29.464,5.715 29.21,5.969 25.527,5.969 25.273,6.223 25.273,14.097 25.146,14.224 23.114,14.224 22.86,14.478 22.86,18.034 22.479,18.415 14.859,18.415 14.605,18.669 14.605,20.066 ; 10.033,25.71 10.033,23.114 10.287,22.86 12.065,22.86 ; 12.065,22.86 12.065,20.193 12.192,20.066 14.605,20.066
SLAVE_CS: P2.3 U5.2 | length 7.8
  Top Layer w0.508: P2.3 52.832,4.318 53.594,5.08 U5.2
SLAVE_RX: P2.4 R19.2 U5.1 | length 11
  Top Layer w0.508: P2.4 50.292,4.953 ; R19.2 50.292,4.953 ; U5.1 52.324,5.207 52.07,4.953 50.292,4.953
SLAVE_TX: P2.1 U5.4 | length 9.1
  Top Layer w0.508: U5.4 56.134,5.842 56.261,5.715 57.785,5.715 57.912,5.588 P2.1
SLAVE_WAKE: P2.2 R30.1 | length 17.3
  Top Layer w0.508: v1(57.912,6.858) 59.69,6.858 59.817,6.985 59.817,14.605 59.944,14.732 R30.1
  Bottom Layer w0.508: P2.2 55.372,6.604 55.626,6.858 v1(57.912,6.858)
VFCONTR: P1.1 R5.1 R6.1 | length 43.2
  Top Layer w0.508: R5.1 v1(85.725,38.354) R6.1
  Bottom Layer w0.508: P1.1 84.836,5.715 84.963,5.842 87.757,5.842 87.884,5.969 87.884,31.496 87.63,31.75 85.979,31.75 85.725,32.004 v1(85.725,38.354)
VFFRENO: P1.3 Q8.2 | length 33.6
  Top Layer w0.508: Q8.2 74.93,5.715 75.057,5.588 79.502,5.588 79.756,5.334 P1.3
pads on no net: C1.0 C2.0 C3.0 C4.0 C5.0 C6.0 C7.0 C8.0 C9.0 C10.0 C11.0 C12.0 C13.0 C14.0 C15.0 C16.0 D1.0 D3.0 D4.0 D5.0 D6.0 D7.0 D8.0 D9.0 D10.0 D11.0 D12.0 D13.0 D14.0 D16.0 R1.0 R2.0 R3.0 R4.0 R5.0 R6.0 R7.0 R9.0 R10.0 R11.0 R12.0 R13.0 R15.0 R16.0 R17.0 R18.0 R19.0 R20.0 R21.0 R22.0 R23.0 R24.0 R25.0 R26.0 R27.0 R28.0 R29.0 R30.0 S1.0 U2.1 U2.5 U2.8 U3.5 U4.8 U5.8

## Polygon pours and split planes (outlines as drawn)
GND on Bottom Layer "GND" (solid, remove dead copper, pour order 0): 0,50.8 100.076,50.8 100.076,0 0,0
GND on Top Layer "GND" (solid, remove dead copper, pour order 4): 0,50.8 0,0 99.822,0 99.822,50.8

## Keep-outs
Keep-Out Layer:
  lines w0.127: 0.254,0.254 99.695,0.254 99.695,50.546 0.254,50.546 0.254,0.254

## Silkscreen, mask and mechanical layers (free items; w line width, h text height)
Top Overlay:
  text "BADENAS / IPAR" at 4.445,36.576 h1.02 r90
  text "Point" at 40.259,19.685 h1.02 r90
  text "8051" at 86.741,2.286 h1.02
  text "Stick" at 6.35,1.905 h1.02
Mechanical 1:
  lines w0.127: 0,0 0,50.8 99.949,50.8 99.949,0 0,0

## Text inside footprints (layer, text, board x,y; h text height)
R8: Top Overlay "CW" at 87.8,23.433 h0.64 r270